# Altium PCB PCB1.PcbDoc
Units mm, origin at the board's own origin, x right, y up, seen from the top; angles counter-clockwise.
Board outline 59.86 x 20.07 mm, 2 copper layers (Top Layer, Bottom Layer); 4 components, 5 nets, 12 pads, 36 vias.
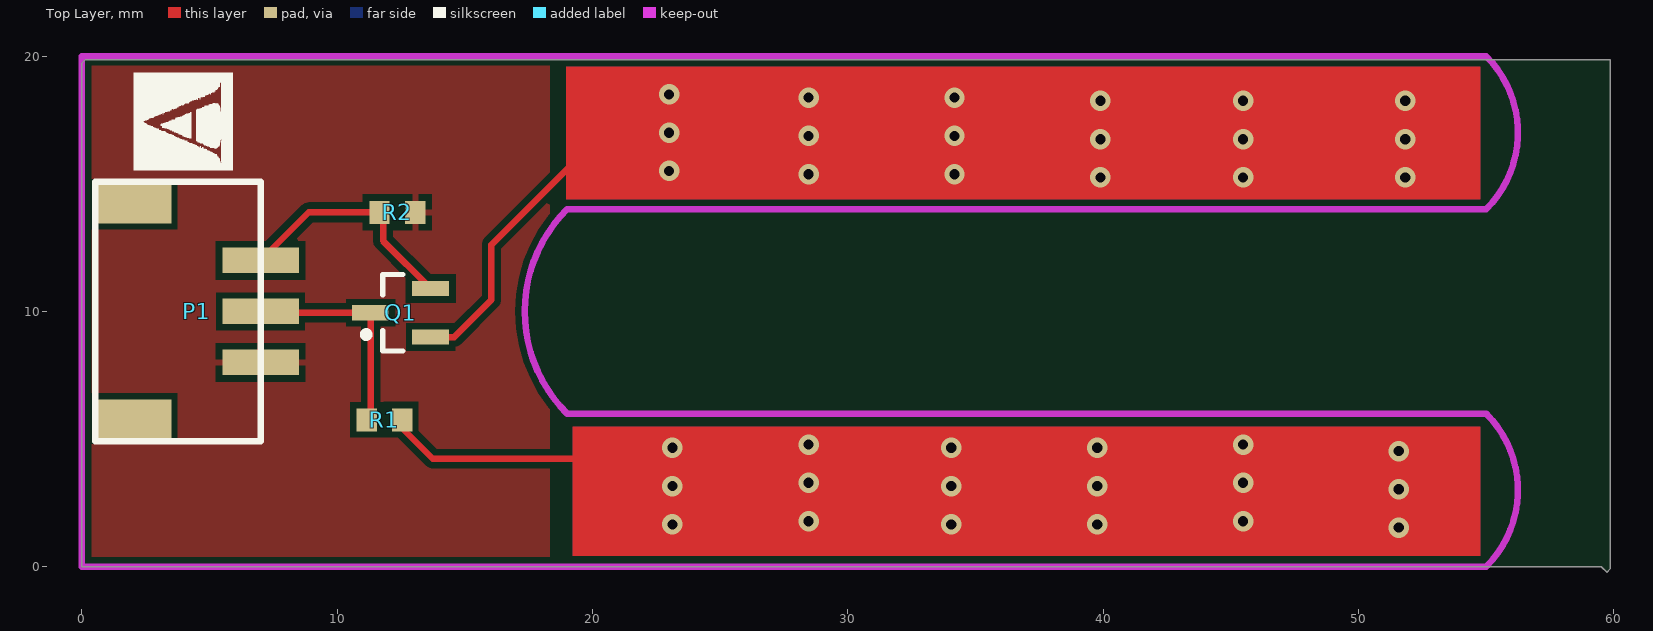
[diagram p0: Top Layer view]
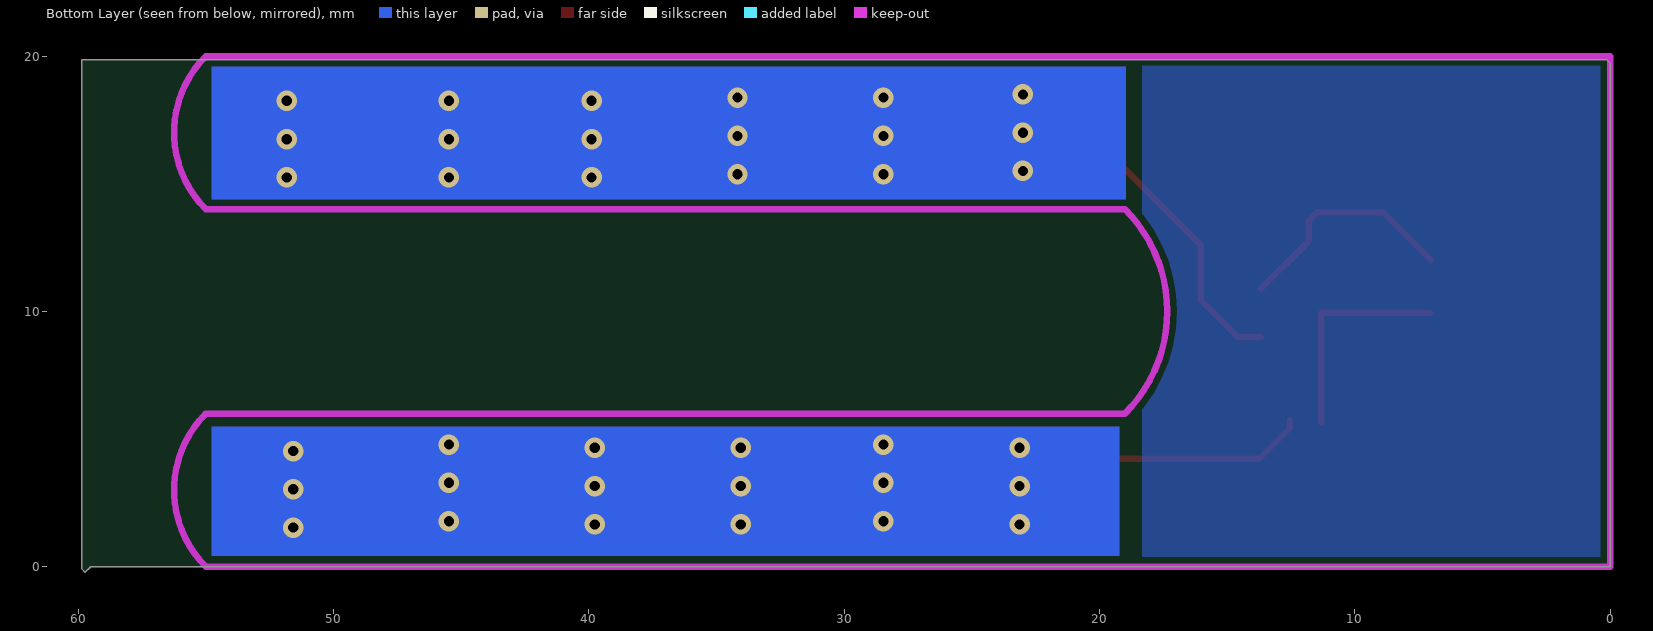
[diagram p1: Bottom Layer view, seen from below]

## Layer stack, top to bottom
Top Layer: signal copper 0.0356
Dielectric: dielectric 0.32, FR-4, Dk 4.8
Bottom Layer: signal copper 0.0356

## Board outline
0,19.723 0.127,19.85 59.855,19.85 59.855,-0.089 59.728,-0.216 59.512,0 0,0

## Design rules (kind name [scope] priority, off if disabled: settings)
Clearance [All] p1: gap=0.254
PolygonConnect [All] p1: connectstyle=Relief reliefconductorwidth=0.254 reliefentries=4 polygonreliefangle="90 Angle"
RoutingVias [All] p1: holewidth=0.711 width=1.27 viastyle="Through Hole" minholewidth=0.711 minwidth=1.27 maxholewidth=0.711 maxwidth=1.27
SilkscreenOverComponentPads [All] p1: minsilkscreentomaskgap=0.254
SolderMaskExpansion [All] p1: expansion=0.102
Width [All] p1: maxlimit=0.254 minlimit=0.254 preferedwidth=0.254
27 further rules are at their usual default settings.

## Components (designator, comment, footprint, x,y, rotation, side; value= is the part's Value field where it differs from the comment)
P1 "Header 3" sh-2.0 7,10 r270 top
Q1 "NPN" SOT23_M 12.484,9.944 r180 top
R1 "Res1" 1608[0603] 11.849,5.753 r180 top
R2 "Res1" 1608[0603] 12.357,13.881 r180 top

## Footprints (in the part's own frame and the unit in brackets; to place one, negate y for a bottom-side part, rotate by r counter-clockwise, add the part's x,y. Pads: shape width x height; smd on the part's side, far side on the other; paste and mask are expansions set on the pad)
1608[0603] [mm] "Chip Capacitor, Body 1.6x0.8mm, IPC High Density"
  rect 0.8x0.9 smd: 1(-0.7,0) 2(0.7,0)
  body extent -0.87,-0.48 0.87,0.48, height 1.3
sh-2.0 [mm]
  rect 1x3 smd: 1(-2,0) 2(0,0) 3(2,0)
  rect 1.5x3 smd: GND(-4.2,-5) GND(4.2,-5)
  silkscreen extent -5.08,-6.48 5.08,0
SOT23_M [mm] "SOT23, 3-Leads, Body 2.9x1.3mm, Pitch 0.95mm, Lead Span 2.3mm - Reverse Pinning, IPC Low Density"
  rect 1.45x0.6 smd: 1(1.175,0) 2(-1.175,-0.95) 3(-1.175,0.95)
  silkscreen extent -0.1,-1.5 1.47,1.5, body extent -0.7,-1.5 0.7,1.5, height 1.1

## Part data
P1: "Header, 3"
Q1: "NPN Bipolar Transistor"
R1 R2: "Resistor"

## Via types
v1: diameter 0.8, hole 0.4, Top Layer to Bottom Layer, 36 vias

## Nets (pads, with @x,y where several pads share a name; then routed paths per layer and width w, separated by ;. In a path a pad name is that pad's centre, name@x,y a point inside that pad or via, vN(x,y) a via of type N, cw(c..) or ccw(c..) an arc to the next point about the centre after c; other vN are vias at no path point)
1: Q1.3 | length 10
  Top Layer w0.254: Q1.3 14.582,8.994 16.04,10.452 16.04,12.611 19.469,16.04
  other v1: 39.891,15.246 45.479,15.246 51.829,15.246 28.461,15.373 34.176,15.373 23,15.5 39.891,16.746 45.479,16.746 51.829,16.746 28.461,16.873 34.176,16.873 23,17 39.891,18.246 45.479,18.246 51.829,18.246 28.461,18.373 34.176,18.373 23,18.5
2: R1.1 | length 8.5
  Top Layer w0.254: R1.1 12.549,5.426 13.746,4.229 20.231,4.229
  other v1: 51.575,1.53 23.127,1.657 34.049,1.657 39.764,1.657 28.461,1.784 45.479,1.784 51.575,3.03 23.127,3.157 34.049,3.157 39.764,3.157 28.461,3.284 45.479,3.284 51.575,4.53 23.127,4.657 34.049,4.657 39.764,4.657 28.461,4.784 45.479,4.784
GND: P1.3 R2.1
NetP1_1: P1.1 Q1.2 R2.2 | length 9.1
  Top Layer w0.254: P1.1 8.881,13.881 11.476,13.881 11.795,13.562 11.795,12.758 Q1.2
VCC: P1.2 Q1.1 R1.2 | length 8.5
  Top Layer w0.254: P1.2@7.056,9.944 Q1.1 R1.2@11.309,5.666
pads on no net: P1.GND
copper on no net: | length 2.3
  Top Layer w0.254: 26.835,-50 26.962,-50 29.121,-50

## Polygon pours and split planes (outlines as drawn)
GND on Top Layer "Top Layer-No Net" (solid, pour order 4): -0.216,20.358 18.326,20.358 18.326,-0.724 17.945,-1.105 17.31,-0.47 -0.216,-0.47
GND on Bottom Layer "Top Layer-No Net" (solid, pour order 6): -0.216,20.231 18.453,20.231 18.326,20.104 18.326,-0.343 -0.089,-0.343 -0.216,-0.47

## Keep-outs
Keep-Out Layer:
  lines w0.254: 0,0 55,0 ccw(c52,3) 55,6 19,6 cw(c23,10) 19,14 55,14 ccw(c52,17) 55,20 0,20 0,0

## Other copper
Top Layer:
  rectangle net 1: 18.961,14.389 54.775,19.596
  rectangle net 2: 19.215,0.419 54.775,5.499
Bottom Layer:
  rectangle net 2: 19.215,0.419 54.775,5.499
  rectangle net 1: 18.961,14.389 54.775,19.596

## Silkscreen, mask and mechanical layers (free items; w line width, h text height)
Top Overlay:
  drawing of 1205 lines, arcs and shapes, not listed
Top Solder:
  text "Moisture Sensor" at 0.927,1.435 h1.2